# EAGLE board pe02 (EAGLE 9.6.2)
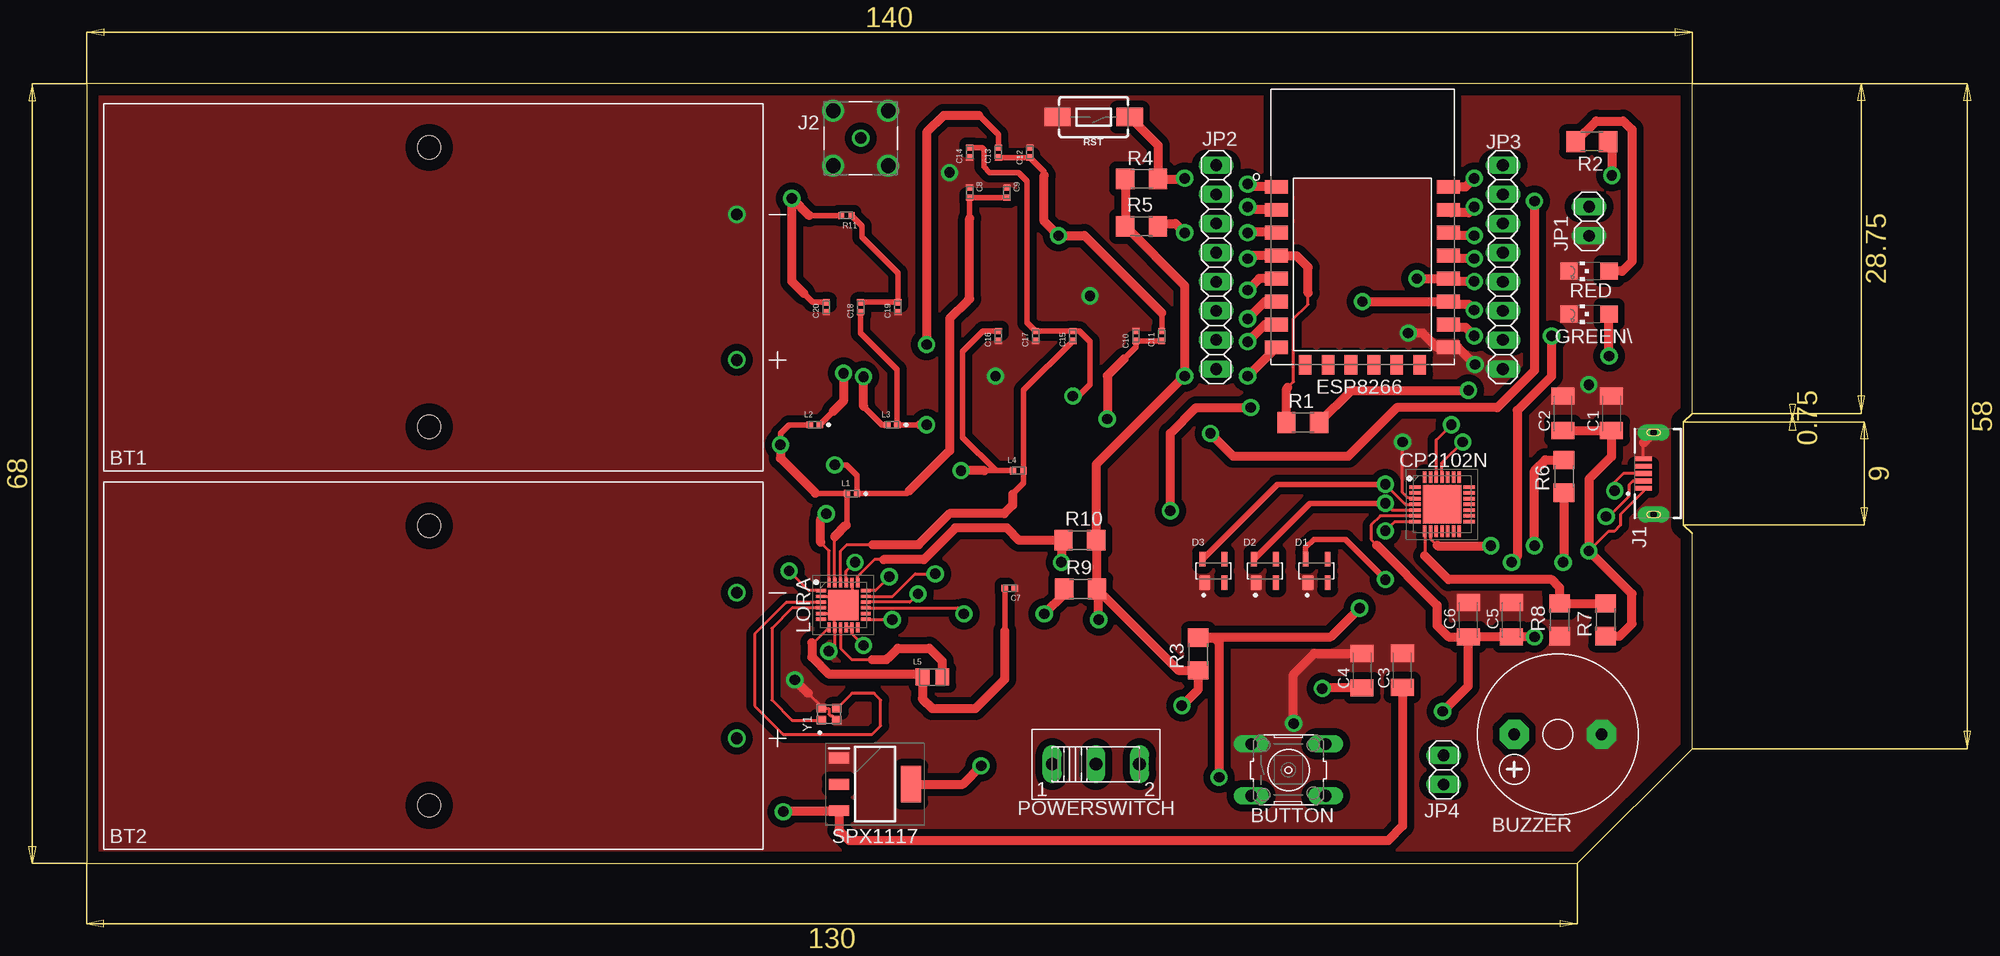
[diagram p0: board, top side]
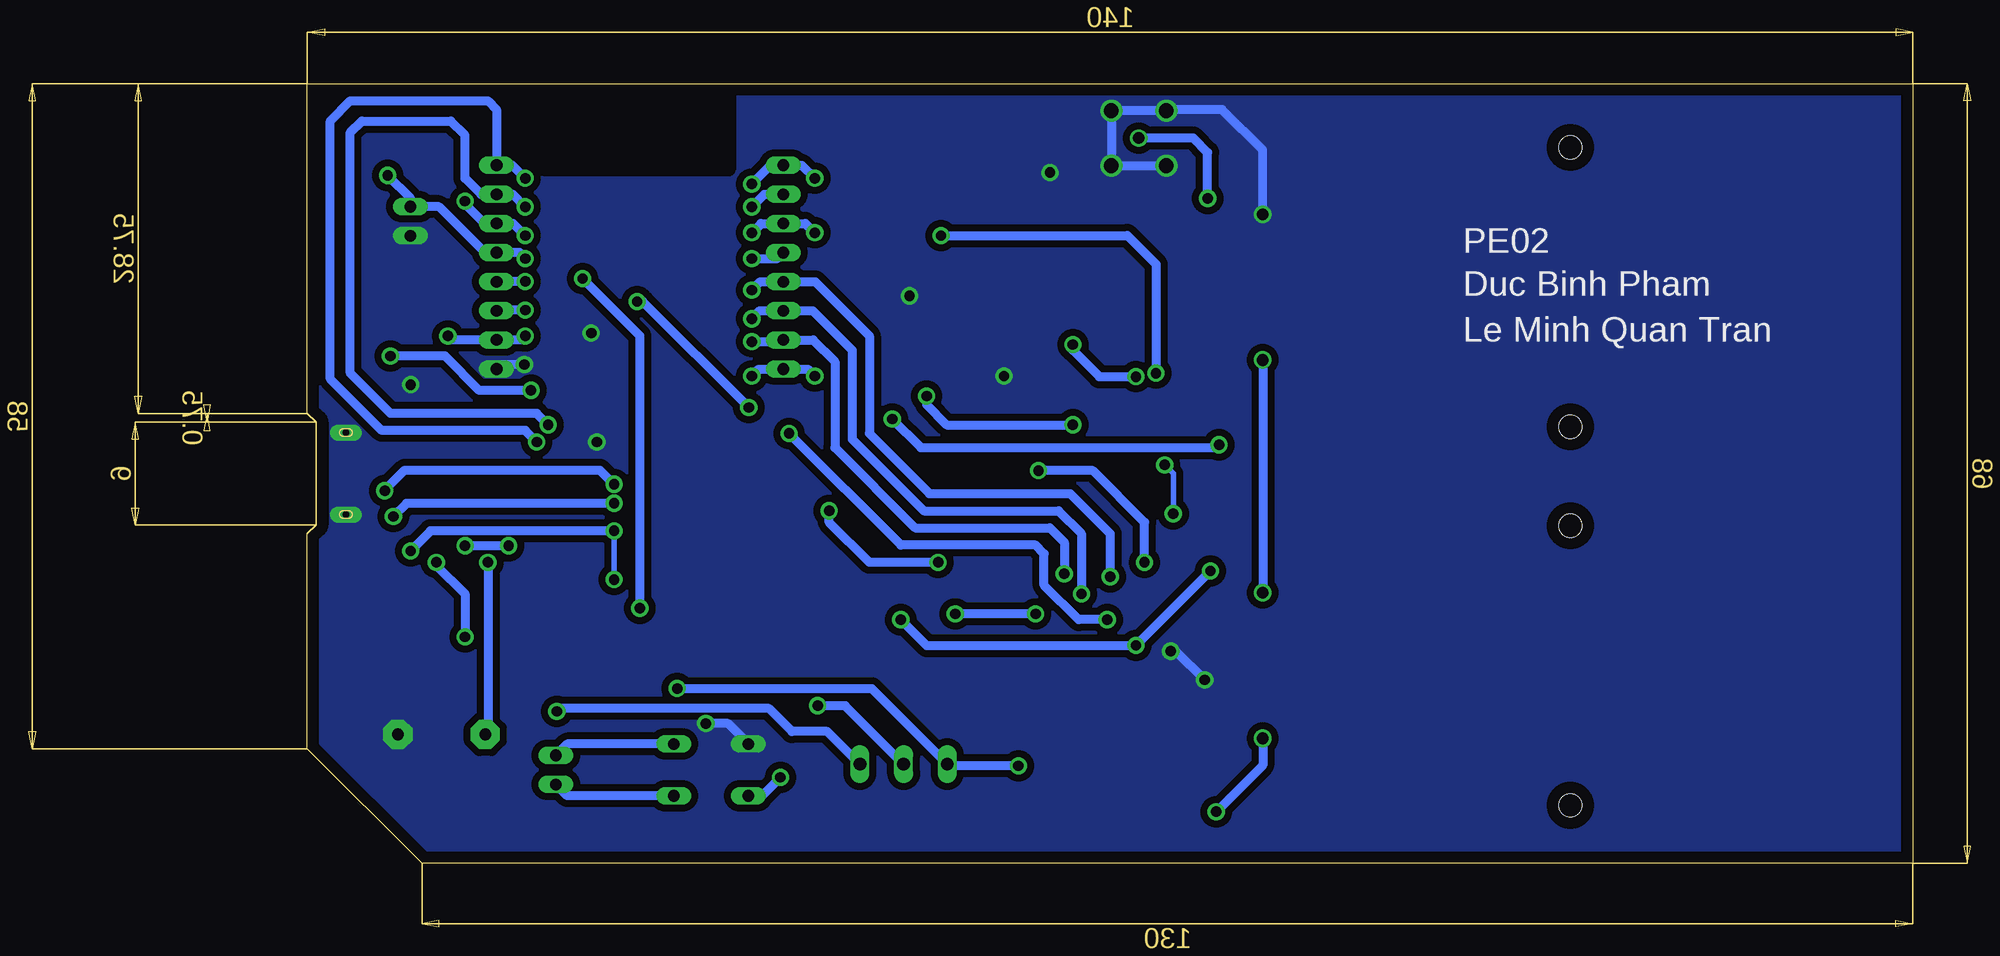
[diagram p1: board, bottom side, seen from below]

Size 140 x 68 mm. Coordinates in mm from the lower left corner, seen from the top.
Outline: 0,0 130,0 140,10 140,28.75 139.25,29.5 139.25,38.5 140,39.25 140,68 0,68 0,0
Copper layers (1*16): Top 0.035mm / dielectric 1.5mm / Bottom 0.035mm
Design rules "default": minimum track width 6mil, minimum drill 0.35mm, track to track 6mil, track to pad 6mil, pad to pad 6mil, via to via 6mil, smd to smd 6mil, copper to edge 40mil, drill to drill 6mil, minimum pad ring 10mil, minimum via ring 8mil, stop-mask expansion 4mil, vias tented up to drill 0mil, thermal gap 10mil
Net classes: 0 default: width 0.8 mm; 2 0.25: width 0.006 mm

## Footprints (pad centres in the part's own frame; a part is rotated, then mirrored left to right if it is on the bottom)
BAT_BA2AAPC-UL94V-0 = drill 1.02: + -26.44,6.35; - -26.44,-6.35 | hole 2.03: 0.38,12.19; 0.38,-12.19
B3F-10XX = drill 1.016 long: 1 -3.251,2.261; 2 3.251,2.261; 3 -3.251,-2.261; 4 3.251,-2.261
F/CM12P = drill 1.016 pad 2.54 octagon: + 3.81,0; - -3.81,0
C1206K = smd 1.5 x 2: 1 -1.5,0; 2 1.5,0
CAPC1005X55N = smd 0.54 x 0.6: 1 -0.432,0; 2 0.432,0
QFN50P500X500X80-29N = smd 1 x 0.3: 1 -2.35,1.5; 2 -2.35,1; 3 -2.35,0.5; 4 -2.35,0; 5 -2.35,-0.5; 6 -2.35,-1; 7 -2.35,-1.5; 15 2.35,-1.5; 16 2.35,-1; 17 2.35,-0.5; 18 2.35,0; 19 2.35,0.5; 20 2.35,1; 21 2.35,1.5 | smd 0.3 x 1: 8 -1.5,-2.35; 9 -1,-2.35; 10 -0.5,-2.35; 11 0,-2.35; 12 0.5,-2.35; 13 1,-2.35; 14 1.5,-2.35; 22 1.5,2.35; 23 1,2.35; 24 0.5,2.35; 25 0,2.35; 26 -0.5,2.35; 27 -1,2.35; 28 -1.5,2.35 | smd 3.35 x 3.35: 29 0,0
SOT143 = smd 0.99 x 1.3: 1 -0.76,-1.025 | smd 0.59 x 1.3: 2 0.96,-1.025; 3 0.96,1.025; 4 -0.96,1.025
XCVR_ESP8266-12E/ESP-12E = smd 2 x 1.2: 1 -7.5,7; 2 -7.5,5; 3 -7.5,3; 4 -7.5,1; 5 -7.5,-1; 6 -7.5,-3; 7 -7.5,-5; 8 -7.5,-7; 15 7.5,-7; 16 7.5,-5; 17 7.5,-3; 18 7.5,-1; 19 7.5,1; 20 7.5,3; 21 7.5,5; 22 7.5,7 | smd 1.1 x 1.7: 9 -5,-8.5; 10 -3,-8.5; 11 -1,-8.5; 12 1,-8.5; 13 3,-8.5; 14 5,-8.5
CHIPLED_1206 = smd 1.5 x 1.5: A 0,-1.75; C 0,1.75
GCT_USB3140-30-0070-1-C_REVE1 = smd 0.4 x 1.5: 1 -1.3,1.25; 2 -0.65,1.25; 3 0,1.25; 4 0.65,1.25; 5 1.3,1.25 | drill 0.6 pad 1.4 long: S1 -3.575,0.36; S2 3.575,0.36
LPRS_SMA_CONNECTOR = drill 1: 1 0,0 | drill 1.28: G1 -2.4,2.4; G2 -2.4,-2.4; G3 2.4,-2.4; G4 2.4,2.4
1X02 = drill 1.016 long: 1 -1.27,0; 2 1.27,0
1X08 = drill 1.016 long: 1 -8.89,0; 2 -6.35,0; 3 -3.81,0; 4 -1.27,0; 5 1.27,0; 6 3.81,0; 7 6.35,0; 8 8.89,0
INDC1005X55N = smd 0.54 x 0.6: 1 -0.432,0; 2 0.432,0
INDC1005X60N = smd 0.51 x 0.63: 1 -0.46,0; 2 0.46,0
INDC2012X145N = smd 1.2 x 1.47: 1 -0.86,0; 2 0.86,0
QFN50P400X400X100-25N = smd 0.85 x 0.3: 1 -1.95,1.25; 2 -1.95,0.75; 3 -1.95,0.25; 4 -1.95,-0.25; 5 -1.95,-0.75; 6 -1.95,-1.25; 13 1.95,-1.25; 14 1.95,-0.75; 15 1.95,-0.25; 16 1.95,0.25; 17 1.95,0.75; 18 1.95,1.25 | smd 0.3 x 0.85: 7 -1.25,-1.95; 8 -0.75,-1.95; 9 -0.25,-1.95; 10 0.25,-1.95; 11 0.75,-1.95; 12 1.25,-1.95; 19 1.25,1.95; 20 0.75,1.95; 21 0.25,1.95; 22 -0.25,1.95; 23 -0.75,1.95; 24 -1.25,1.95 | smd 2.65 x 2.65: 25 0,0
255SB = drill 1.118 long: 1 -3.81,0; 2 0,0; 3 3.81,0
R1206 = smd 1.6 x 1.803: 1 -1.422,0; 2 1.422,0
RESC1005X40N = smd 0.51 x 0.6: 1 -0.445,0; 2 0.445,0
TACTILE_SWITCH_SMD_6.0X3.5MM = smd 2.3 x 1.6: 1 -3.15,0; 2 3.15,0
SOT230P700X180-4N = smd 1.75 x 0.95: 1 -3.15,2.3; 2 -3.15,0; 3 -3.15,-2.3 | smd 1.75 x 3.2: 4 3.15,0
OSC_NX2016SA-24MHZ-EXS00A-CS10820 = smd 0.75 x 0.85: 1 -0.525,0.675; 2 -0.525,-0.675; 3 0.525,-0.675; 4 0.525,0.675

## Placement (x,y rotation side)
BT1  BA2AAPC-UL94V-0  [BAT_BA2AAPC-UL94V-0]  30.25,50.25 180 top
BT2  BA2AAPC-UL94V-0  [BAT_BA2AAPC-UL94V-0]  30.25,17.25 180 top
BUTTON  [B3F-10XX]  104.8,8.15 0 top
BUZZER  F/CM12P  [F/CM12P]  128.3,11.25 180 top
C1  0.1 uF  [C1206K]  132.97,39.25 90 top
C2  4.7 uF  [C1206K]  128.72,39.25 90 top
C3  4.7 uF  [C1206K]  114.72,16.84 90 top
C4  10 uF  [C1206K]  111.22,16.81 90 top
C5  4.7 uF  [C1206K]  124.22,21.25 90 top
C6  0.1 uF  [C1206K]  120.47,21.25 90 top
C7  GRM155R71A474KE01D  [CAPC1005X55N]  80.5,24 180 top
C8  GRM155R71C473KA01D  [CAPC1005X55N]  77,58.5 270 top
C9  GCM1555C1H820JA16D  [CAPC1005X55N]  80.25,58.5 270 top
C10  GJM1555C1H120JB01D  [CAPC1005X55N]  91.5,46 270 top
C11  GJM1555C1H3R6CB01D  [CAPC1005X55N]  93.75,46 90 top
C12  GJM1555C1H120JB01D  [CAPC1005X55N]  82.25,62 270 top
C13  GCM1555C1H101JA16D  [CAPC1005X55N]  79.5,62 90 top
C14  GJM1555C1H8R2CB01D  [CAPC1005X55N]  77,62 90 top
C15  GJM1555C1H4R7CB01D  [CAPC1005X55N]  86,46 90 top
C16  GJM1555C1H3R9CB01D  [CAPC1005X55N]  79.5,46 90 top
C17  GJM1555C1H1R0BB01D  [CAPC1005X55N]  82.75,46 90 top
C18  GCM1555C1H101JA16D  [CAPC1005X55N]  67.5,48.5 90 top
C19  GJM1555C1H120JB01D  [CAPC1005X55N]  70.75,48.5 90 top
C20  GJM1555C1H120JB01D  [CAPC1005X55N]  64.5,48.5 90 top
CP2102N  CP2102N-A02-GQFN28  [QFN50P500X500X80-29N]  118.19,31.31 0 top
D1  SP0503BAHTG  [SOT143]  107.25,25.5 0 top
D2  SP0503BAHTG  [SOT143]  102.75,25.5 0 top
D3  SP0503BAHTG  [SOT143]  98.25,25.5 0 top
ESP8266  ESP8266-12E/ESP-12E  [XCVR_ESP8266-12E/ESP-12E]  111.25,52 0 top
GREEN\  [CHIPLED_1206]  131,47.9 90 top
J1  USB3140-30-0070-1-C_REVE1  [GCT_USB3140-30-0070-1-C_REVE1]  137,34 90 top
J2  SMA_CONNECTOR  [LPRS_SMA_CONNECTOR]  67.5,63.25 0 top
JP1  [1X02]  131,56 90 top
JP2  [1X08]  98.5,52 270 top
JP3  [1X08]  123.5,52 270 top
JP4  [1X02]  118.34,8.15 90 top
L1  LQG15HS56NJ02D  [INDC1005X55N]  66.75,32.25 0 top
L2  LQG15HS8N2J02D  [INDC1005X55N]  63.5,38.25 0 top
L3  LQG15HN18NJ02D  [INDC1005X55N]  70.25,38.25 0 top
L4  LQW15AN33NH00D  [INDC1005X60N]  81.25,34.25 0 top
L5  MLZ2012M150WT000  [INDC2012X145N]  73.75,16.25 0 top
LORA  SX1268  [QFN50P400X400X100-25N]  65.99,22.53 0 top
POWERSWITCH  [255SB]  88.01,8.65 0 top
R1  100  [R1206]  106.05,38.45 0 top
R2  100  [R1206]  131.25,62.95 180 top
R3  10k  [R1206]  96.94,18.25 90 top
R4  10k  [R1206]  92,59.69 180 top
R5  10k  [R1206]  92,55.56 0 top
R6  1k  [R1206]  128.82,33.76 90 top
R7  22.1 k  [R1206]  132.44,21.25 270 top
R8  47.5 k  [R1206]  128.44,21.25 90 top
R9  10k  [R1206]  86.68,23.93 0 top
R10  10k  [R1206]  86.6,28.18 0 top
R11  CRCW04020000Z0ED  [RESC1005X40N]  66.25,56.5 180 top
RED  [CHIPLED_1206]  131,51.65 90 top
RST  MOMENTARY-SWITCH-SPST-SMD-6.0X3.5MM  [TACTILE_SWITCH_SMD_6.0X3.5MM]  87.81,65.09 180 top
SPX1117  SPX1117M3-L-3-3_TR  [SOT230P700X180-4N]  68.75,6.9 0 top
Y1  NX2016SA-24MHZ-EXS00A-CS10820  [OSC_NX2016SA-24MHZ-EXS00A-CS10820]  64.75,13 90 top

## Library data of the parts
BT1 BT2 = BA2AAPC-UL94V-0; AVAILABILITY: In Stock; CHECK_PRICES: https://www.snapeda.com/parts/BA2AAPC-UL94V-0/MPD/view-part/?ref=eda; DESCRIPTION: BATTERY HOLDER AA 2 CELL SMD TAB; MF: MPD; MP: BA2AAPC-UL94V-0; PACKAGE: None; PRICE: None; SNAPEDA_LINK: https://www.snapeda.com/parts/BA2AAPC-UL94V-0/MPD/view-part/?ref=snap
BUTTON = switch-omron; MPN: B3F-1000; OC_FARNELL: 176432; OC_NEWARK: 36M3542
BUZZER = buzzer; OC_FARNELL: unknown; OC_NEWARK: unknown
C1-C6 = rcl; SPICEPREFIX: C
C7 = GRM155R71A474KE01D; AVAILABILITY: In Stock; CHECK_PRICES: https://www.snapeda.com/parts/GRM155R71A474KE01D/Murata+Electronics+North+America/view-part/?ref=eda; DESCRIPTION: SMD capacitor X7R(EIA) with capacitance 0.47uF Tol.10%. Rated voltage 10Vdc 125C; MF: Murata; MP: GRM155R71A474KE01D; PACKAGE: 1005-2 Murata; PRICE: None; SNAPEDA_LINK: https://www.snapeda.com/parts/GRM155R71A474KE01D/Murata+Electronics+North+America/view-part/?ref=snap
C8 = GRM155R71C473KA01D; AVAILABILITY: In Stock; CHECK_PRICES: https://www.snapeda.com/parts/GRM155R71C473KA01D/Murata+Electronics+North+America/view-part/?ref=eda; DESCRIPTION: SMD capacitor X7R(EIA) with capacitance 47000pF Tol.10%. Rated voltage 16Vdc 125C; MF: Murata; MP: GRM155R71C473KA01D; PACKAGE: 1005-2 Murata; PRICE: None; SNAPEDA_LINK: https://www.snapeda.com/parts/GRM155R71C473KA01D/Murata+Electronics+North+America/view-part/?ref=snap
C9 = GCM1555C1H820JA16D; AVAILABILITY: In Stock; CHECK_PRICES: https://www.snapeda.com/parts/GCM1555C1H820JA16D/Murata+Electronics+North+America/view-part/?ref=eda; DESCRIPTION: Cap Ceramic 82pF 50V C0G 5% Pad SMD 0402 125C Automotive T/R; MF: Murata Electronics; MP: GCM1555C1H820JA16D; PACKAGE: 1005 Taiyo Yuden; PRICE: None; SNAPEDA_LINK: https://www.snapeda.com/parts/GCM1555C1H820JA16D/Murata+Electronics+North+America/view-part/?ref=snap
C10 C12 C19 C20 = GJM1555C1H120JB01D; AVAILABILITY: In Stock; CHECK_PRICES: https://www.snapeda.com/parts/GJM1555C1H120JB01D/Murata+Electronics+North+America/view-part/?ref=eda; DESCRIPTION: 12 pF ±5% 50V Ceramic Capacitor C0G, NP0 0402 (1005 Metric); MF: Murata; MP: GJM1555C1H120JB01D; PACKAGE: 1005 Taiyo Yuden; PRICE: None; SNAPEDA_LINK: https://www.snapeda.com/parts/GJM1555C1H120JB01D/Murata+Electronics+North+America/view-part/?ref=snap
C11 = GJM1555C1H3R6CB01D; AVAILABILITY: In Stock; CHECK_PRICES: https://www.snapeda.com/parts/GJM1555C1H3R6CB01D/Murata+Electronics+North+America/view-part/?ref=eda; DESCRIPTION: 0402 3.6 pF 50 V ±0.25 pF Tolerance C0G/NP0 Multilayer Ceramic Capacitor; MF: Murata; MP: GJM1555C1H3R6CB01D; PACKAGE: 1005 Taiyo Yuden; PRICE: None; SNAPEDA_LINK: https://www.snapeda.com/parts/GJM1555C1H3R6CB01D/Murata+Electronics+North+America/view-part/?ref=snap
C13 C18 = GCM1555C1H101JA16D; AVAILABILITY: In Stock; CHECK_PRICES: https://www.snapeda.com/parts/GCM1555C1H101JA16D/Murata+Electronics+North+America/view-part/?ref=eda; DESCRIPTION: SMD Multilayer Ceramic Capacitor, GCM Series, 100 pF, 5%, C0G / NP0, 50 V, 0402 [1005 Metric]; MF: Murata Electronics; MP: GCM1555C1H101JA16D; PACKAGE: 1005 Taiyo Yuden; PRICE: None; SNAPEDA_LINK: https://www.snapeda.com/parts/GCM1555C1H101JA16D/Murata+Electronics+North+America/view-part/?ref=snap
C14 = GJM1555C1H8R2CB01D; AVAILABILITY: In Stock; CHECK_PRICES: https://www.snapeda.com/parts/GJM1555C1H8R2CB01D/Murata+Electronics+North+America/view-part/?ref=eda; DESCRIPTION: 8.2 pF ±0.25pF 50V Ceramic Capacitor C0G, NP0 0402 (1005 Metric); MF: Murata; MP: GJM1555C1H8R2CB01D; PACKAGE: 1005 Taiyo Yuden; PRICE: None; SNAPEDA_LINK: https://www.snapeda.com/parts/GJM1555C1H8R2CB01D/Murata+Electronics+North+America/view-part/?ref=snap
C15 = GJM1555C1H4R7CB01D; AVAILABILITY: In Stock; CHECK_PRICES: https://www.snapeda.com/parts/GJM1555C1H4R7CB01D/Murata+Electronics+North+America/view-part/?ref=eda; DESCRIPTION: 0402 4.7pF 50V ±0.25 pF Tolerance C0G SMT Multilayer Ceramic Capacitor; MF: Murata; MP: GJM1555C1H4R7CB01D; PACKAGE: 1005 Taiyo Yuden; PRICE: None; SNAPEDA_LINK: https://www.snapeda.com/parts/GJM1555C1H4R7CB01D/Murata+Electronics+North+America/view-part/?ref=snap
C16 = GJM1555C1H3R9CB01D; AVAILABILITY: In Stock; CHECK_PRICES: https://www.snapeda.com/parts/GJM1555C1H3R9CB01D/Murata+Electronics+North+America/view-part/?ref=eda; DESCRIPTION: 0402 3.9 pF 50V ±0.25 pF Tolerance C0G SMT Multilayer Ceramic Capacitor; MF: Murata; MP: GJM1555C1H3R9CB01D; PACKAGE: 1005 Taiyo Yuden; PRICE: None; SNAPEDA_LINK: https://www.snapeda.com/parts/GJM1555C1H3R9CB01D/Murata+Electronics+North+America/view-part/?ref=snap
C17 = GJM1555C1H1R0BB01D; AVAILABILITY: In Stock; CHECK_PRICES: https://www.snapeda.com/parts/GJM1555C1H1R0BB01D/Murata+Electronics+North+America/view-part/?ref=eda; DESCRIPTION: 0402 1 pF 50 V ±0.1 pF Tolerance C0G SMT Multilayer Ceramic Capacitor; MF: Murata; MP: GJM1555C1H1R0BB01D; PACKAGE: 1005 Taiyo Yuden; PRICE: None; SNAPEDA_LINK: https://www.snapeda.com/parts/GJM1555C1H1R0BB01D/Murata+Electronics+North+America/view-part/?ref=snap
CP2102N = CP2102N-A02-GQFN28; DESCRIPTION: SILICON LABS - CP2102N-A02-GQFN28 - USB TO UART BRIDGE, -40 TO 85DEG C; HEIGHT: 0.8mm; MANUFACTURER_NAME: Silicon Labs; MANUFACTURER_PART_NUMBER: CP2102N-A02-GQFN28; MOUSER_PART_NUMBER: 634-CP2102NA02GQFN28; MOUSER_PRICE-STOCK: https://www.mouser.co.uk/ProductDetail/Silicon-Labs/CP2102N-A02-GQFN28?qs=u16ybLDytRaSBkSkyjYFiA%3D%3D
D1-D3 = SP0503BAHTG; AVAILABILITY: In Stock; CHECK_PRICES: https://www.snapeda.com/parts/SP0503BAHTG/Littelfuse+Inc./view-part/?ref=eda; DESCRIPTION: 8.5V Clamp - Ipp Tvs Diode Surface Mount SOT-143-4; MF: Littelfuse Inc.; MP: SP0503BAHTG; PACKAGE: SOT-143 Littelfuse; PRICE: None; SNAPEDA_LINK: https://www.snapeda.com/parts/SP0503BAHTG/Littelfuse+Inc./view-part/?ref=snap
ESP8266 = ESP8266-12E_ESP-12E; AVAILABILITY: Not in stock; CHECK_PRICES: https://www.snapeda.com/parts/ESP8266-12E/ESP-12E/AI-Thinker/view-part/?ref=eda; DESCRIPTION: This WiFi module has a 32-bit MCU micro and clock speeds supporting 80 MHz or 160 MHz. Supports the RTOS and integrated Wi-Fi MAC/BB/RF/PA/LNA, and has an on-board antenna.; MF: AI-Thinker; MP: ESP8266-12E/ESP-12E; PACKAGE: None; PRICE: None; SNAPEDA_LINK: https://www.snapeda.com/parts/ESP8266-12E/ESP-12E/AI-Thinker/view-part/?ref=snap
GREEN\ RED = led
J1 = USB3140-30-0070-1-C_REVE1; AVAILABILITY: In Stock; CHECK_PRICES: https://www.snapeda.com/parts/USB3140-30-0070-1-C/Global+Connector+Technology/view-part/?ref=eda; DESCRIPTION: USB - micro B USB 2.0 Receptacle Connector 5 Position Surface Mount, Through Hole; MF: Global Connector Technology; MP: USB3140-30-0070-1-C; PACKAGE: None; PRICE: None; SNAPEDA_LINK: https://www.snapeda.com/parts/USB3140-30-0070-1-C/Global+Connector+Technology/view-part/?ref=snap
J2 = SMA_CONNECTOR; AVAILABILITY: In Stock; CHECK_PRICES: https://www.snapeda.com/parts/SMA%20CONNECTOR/LPRS/view-part/?ref=eda; DESCRIPTION: RF Coaxial Straight SMA Connector; MF: LPRS; MP: SMA CONNECTOR; PACKAGE: None; PRICE: None; PURCHASE-URL: https://www.snapeda.com/api/url_track_click_mouser/?unipart_id=4703486&manufacturer=LPRS&part_name=SMA CONNECTOR&search_term=None; SNAPEDA_LINK: https://www.snapeda.com/parts/SMA%20CONNECTOR/LPRS/view-part/?ref=snap
JP1-JP4 = pinhead
L1 = LQG15HS56NJ02D; AVAILABILITY: In Stock; CHECK_PRICES: https://www.snapeda.com/parts/LQG15HS56NJ02D/Murata+Electronics+North+America/view-part/?ref=eda; DESCRIPTION: Inductor with Inductance: 56nH Tol. +/-5%, Package: 0402 (1005); MF: Murata; MP: LQG15HS56NJ02D; PACKAGE: 1005 Murata; PRICE: None; SNAPEDA_LINK: https://www.snapeda.com/parts/LQG15HS56NJ02D/Murata+Electronics+North+America/view-part/?ref=snap
L2 = LQG15HS8N2J02D; AVAILABILITY: In Stock; CHECK_PRICES: https://www.snapeda.com/parts/LQG15HS8N2J02D/Murata+Electronics+North+America/view-part/?ref=eda; DESCRIPTION: Inductor with Inductance: 8.2nH Tol. +/-5%, Package: 0402 (1005); MF: Murata; MP: LQG15HS8N2J02D; PACKAGE: 1005 Murata; PRICE: None; SNAPEDA_LINK: https://www.snapeda.com/parts/LQG15HS8N2J02D/Murata+Electronics+North+America/view-part/?ref=snap
L3 = LQG15HN18NJ02D; AVAILABILITY: In Stock; CHECK_PRICES: https://www.snapeda.com/parts/LQG15HN18NJ02D/Murata+Electronics+North+America/view-part/?ref=eda; DESCRIPTION: Inductor with Inductance: 18nH Tol. +/-5%, Package: 0402 (1005); MF: Murata; MP: LQG15HN18NJ02D; PACKAGE: 1005 Murata; PRICE: None; SNAPEDA_LINK: https://www.snapeda.com/parts/LQG15HN18NJ02D/Murata+Electronics+North+America/view-part/?ref=snap
L4 = LQW15AN33NH00D; AVAILABILITY: In Stock; CHECK_PRICES: https://www.snapeda.com/parts/LQW15AN33NH00D/Murata+Electronics+North+America/view-part/?ref=eda; DESCRIPTION: Inductor with Inductance: 33nH Tol. +/-3%, Package: 0402 (1005); MF: Murata; MP: LQW15AN33NH00D; PACKAGE: 1005 Murata; PRICE: None; SNAPEDA_LINK: https://www.snapeda.com/parts/LQW15AN33NH00D/Murata+Electronics+North+America/view-part/?ref=snap
L5 = MLZ2012M150WT000; AVAILABILITY: In Stock; CHECK_PRICES: https://www.snapeda.com/parts/MLZ2012M150WT000/TDK/view-part/?ref=eda; DESCRIPTION: Inductor Power Shielded Multi-Layer 15uH 20% 2MHz Ferrite 0.25A 1.235Ohm DCR 0805 T/R; MF: TDK Corporation; MP: MLZ2012M150WT000; PACKAGE: None; PRICE: None; SNAPEDA_LINK: https://www.snapeda.com/parts/MLZ2012M150WT000/TDK/view-part/?ref=snap
LORA = SX1268; DESCRIPTION: LoRa Connect Long Range Low Power LoRa Transceiver +22dBm, China frequency bands; HEIGHT: 1mm; MANUFACTURER_NAME: SEMTECH; MANUFACTURER_PART_NUMBER: SX1268
POWERSWITCH = switch
R1-R10 = rcl; SPICEPREFIX: R
R11 = CRCW04020000Z0ED; AVAILABILITY: In Stock; CHECK_PRICES: https://www.snapeda.com/parts/CRCW04020000Z0ED/Vishay+Dale/view-part/?ref=eda; DESCRIPTION: 0 Ohms Jumper 0.2W, 1/5W Chip Resistor 0402 (1005 Metric) Automotive AEC-Q200, Pulse Withstanding Thick Film; MF: Vishay; MP: CRCW04020000Z0ED; PACKAGE: 1005 Panasonic Electronic Components; PRICE: None; SNAPEDA_LINK: https://www.snapeda.com/parts/CRCW04020000Z0ED/Vishay+Dale/view-part/?ref=snap
RST = SparkFun-Switches; PROD_ID: SWCH-14278; SF_SKU: COM-08229
SPX1117 = SPX1117M3-L-3-3_TR; ARROW_PART_NUMBER: SPX1117M3-L-3-3/TR; ARROW_PRICE-STOCK: https://www.arrow.com/en/products/spx1117m3-l-3-3tr/exar; DESCRIPTION: LDO Regulator 3.3V 800mA 2.6-15V TO263-3; HEIGHT: 1.8mm; MANUFACTURER_NAME: EXAR; MANUFACTURER_PART_NUMBER: SPX1117M3-L-3-3/TR; MOUSER_PART_NUMBER: 701-SPX1117M3-L-33TR; MOUSER_PRICE-STOCK: https://www.mouser.com/Search/Refine.aspx?Keyword=701-SPX1117M3-L-33TR
Y1 = NX2016SA-24MHZ-EXS00A-CS10820; AVAILABILITY: In Stock; CHECK_PRICES: https://www.snapeda.com/parts/NX2016SA-24MHZ-EXS00A-CS10820/NDK+America%252C+Inc./view-part/?ref=eda; DESCRIPTION: 24 MHz ±15ppm Crystal 8pF 80 Ohms 4-SMD, No Lead; MF: NDK America, Inc.; MP: NX2016SA-24MHZ-EXS00A-CS10820; PACKAGE: SMD-4 NDK America,; PRICE: None; SNAPEDA_LINK: https://www.snapeda.com/parts/NX2016SA-24MHZ-EXS00A-CS10820/NDK+America%252C+Inc./view-part/?ref=snap

## Nets
3.3V [random]: ESP8266.8 JP2.8 LORA.1 LORA.10 LORA.11 POWERSWITCH.2 R3.1 R4.2 R5.1 R9.2 R10.2
3.3V_LDO [random]: C4.1 POWERSWITCH.1 SPX1117.4
3.3V_USB [random]: C5.1 C6.1 CP2102N.6 POWERSWITCH.3 R6.1
6V [random]: BT2.+ C3.1 SPX1117.3
BGND [random]: CP2102N.29
ESP_ADC [random]: ESP8266.2 JP2.2
ESP_CS0 [random]: ESP8266.9
ESP_EN [random]: ESP8266.3 JP2.3 R5.2
ESP_MISO [random]: ESP8266.10
ESP_MOSI [random]: ESP8266.13
ESP_RST [random]: ESP8266.1 JP2.1 R4.1 RST.1
ESP_RXD [random]: CP2102N.26 ESP8266.21 JP3.2
ESP_SCLK [random]: ESP8266.14
ESP_TXD [random]: CP2102N.25 ESP8266.22 JP3.1
GND [random]: BT1.- BUTTON.1 BUZZER.- C1.2 C2.2 C3.2 C4.2 C5.2 C6.2 C7.1 C8.1 C9.1 C10.1 C12.1 C14.1 C16.1 C17.1 C19.1 C20.1 CP2102N.3 D1.1 D2.1 D3.1 ESP8266.15 GREEN\.C J1.5 J1.S1 J1.S2 J2.G1 J2.G2 J2.G3 J2.G4 JP1.1 JP3.8 LORA.2 LORA.5 LORA.8 LORA.20 LORA.25 R8.1 RED.C RST.2 SPX1117.1 Y1.2 Y1.4
GPIO0 [random]: BUTTON.3 ESP8266.18 JP3.5 R3.2
GPIO2 [random]: ESP8266.17 JP3.6 LORA.19 R10.1
GPIO4 [random]: ESP8266.19 JP1.2 JP3.4 R2.1
GPIO5 [random]: ESP8266.20 JP3.3 LORA.13
GPIO9 [random]: ESP8266.11
GPIO10 [random]: ESP8266.12
GPIO12 [random]: ESP8266.6 JP2.6 LORA.16
GPIO13 [random]: ESP8266.7 JP2.7 LORA.17
GPIO14 [random]: ESP8266.5 JP2.5 LORA.18
GPIO15 [random]: BUZZER.+ ESP8266.16 JP3.7
GPIO16 [random]: ESP8266.4 JP2.4 R1.1
LORA_BUSY [random]: LORA.14
LORA_DIO2 [random]: LORA.12
LORA_DIO3 [random]: LORA.6
LORA_RFI_N [random]: C15.1 L4.2 LORA.22
LORA_RFI_P [random]: C16.2 L4.1 LORA.21
LORA_RFO [random]: C10.2 C11.1 L1.1 L2.1 LORA.23
LORA_RST [random]: LORA.15 R9.1
LORA_VR_PA [random]: C8.2 C9.2 L1.2 LORA.24
LORA_XTA [random]: LORA.3 Y1.3
LORA_XTB [random]: LORA.4 Y1.1
N$1 [random]: BUTTON.4 JP4.1
N$2 [random]: BUTTON.2 JP4.2
N$3 [random]: C7.2 L5.1 LORA.7
N$4 [random]: L5.2 LORA.9
N$5 [random]: CP2102N.5 D2.4 J1.2
N$6 [random]: C13.2 L3.1
N$7 [random]: GREEN\.A R1.2
N$8 [random]: R2.2 RED.A
N$9 [random]: C11.2 C12.2 C13.1 L2.2
N$10 [random]: BT1.+ BT2.-
N$12 [random]: C14.2 C15.2 C17.2 C18.1 L3.2
N$13 [random]: C20.2 J2.1 R11.2
N$15 [random]: C18.2 C19.2 R11.1
N$34 [random]: CP2102N.4 D3.4 J1.3
N$39 [random]: CP2102N.9 R6.2
N$40 [random]: CP2102N.8 R7.1 R8.2
N$42 [random]: C1.1 C2.1 CP2102N.7 D1.4 J1.1 R7.2

## Tracks (layer width: path | path; a pad name or v marks a point on that pad's centre or on a via)
3.3V  (via drill 0.9 pad 1.5)
  Top 0.25: LORA.10 LORA.11 66.74,20.01 v67.75,19 | LORA.1 62.97,23.78 v61.25,25.5
  Top 0.8: v95.5,13.75 96.94,15.19 R3.1 95.2,16.83 R9.2 | R4.2 R5.1 95.75,50.39 v95.75,42.5 88.02,34.77 R10.2 88.1,28.1 R9.2 | v88.25,21.25 88.25,23.78 R9.2 | ESP8266.8 v101.25,42.5
  Bottom 0.8: POWERSWITCH.2 93.11,13.75 v95.5,13.75 | v88.25,21.25 86,19 v67.75,19 v61.25,25.5 | v101.25,42.5 100.64,43.11 JP2.8 96.36,43.11 v95.75,42.5
3.3V_LDO  (via drill 0.9 pad 1.5)
  Top 0.8: SPX1117.4 76.4,6.9 v78,8.5 | C4.1 107.81,15.31 v107.75,15.25
  Bottom 0.8: v78,8.5 84.05,8.5 POWERSWITCH.1 90.8,15.25 v107.75,15.25
3.3V_USB  (via drill 0.9 pad 1.5)
  Top 0.25: CP2102N.6 112.81,30.31 112,29.5 112,28.25 112.5,27.75
  Top 0.8: C6.1 C5.1 v126.25,19.75 | v118.25,13.25 120.47,15.47 C6.1 | R6.1 128.82,26.32 v128.75,26.25 | 112.5,27.75 117.75,22.5 117.75,20.75 118.75,19.75 C6.1
  Bottom 0.8: POWERSWITCH.3 94.67,11.5 97.75,11.5 99.75,13.5 118,13.5 v118.25,13.25 | v128.75,26.25 128.75,26 126.25,23.5 v126.25,19.75
6V  (via drill 0.9 pad 1.5)
  Top 0.8: v60.75,4.5 60.85,4.6 SPX1117.3 65.6,2.9 66.5,2 113.5,2 114.75,3.25 114.72,3.28 C3.1
  Bottom 0.8: BT2.+ 56.69,8.56 v60.75,4.5
ESP_ADC  (via drill 0.9 pad 1.5)
  Top 0.8: ESP8266.2 101.5,57 v101.25,57.25
  Bottom 0.8: v101.25,57.25 100.15,58.35 JP2.2
ESP_EN  (via drill 0.9 pad 1.5)
  Top 0.8: ESP8266.3 103.69,55.06 101.31,55.06 v101.25,55 | R5.2 93.67,55.81 94.94,55.81 v95.75,55
  Bottom 0.8: v101.25,55 100.44,55.81 JP2.3 96.56,55.81 v95.75,55
ESP_RST  (via drill 0.9 pad 1.5)
  Top 0.8: ESP8266.1 101.5,59 v101.25,59.25 | v95.75,59.75 95.69,59.69 R4.1 93.42,62.63 RST.1
  Bottom 0.8: v101.25,59.25 99.61,60.89 JP2.1 96.89,60.89 v95.75,59.75
ESP_RXD  (via drill 0.9 pad 1.5)
  Top 0.25: CP2102N.26 117.69,36.94 v119,38.25
  Top 0.8: ESP8266.21 119,56.75 120.5,56.75 v121,57.25
  Bottom 0.8: v119,38.25 120,39.25 132.75,39.25 136.25,42.75 136.25,63.75 135.25,64.75 127.5,64.75 126.25,63.5 126.25,59.75 124.85,58.35 JP3.2 122.1,58.35 v121,57.25
ESP_TXD  (via drill 0.9 pad 1.5)
  Top 0.25: CP2102N.25 118.19,34.94 v120,36.75
  Top 0.8: ESP8266.22 120.25,59 v121,59.75
  Bottom 0.8: v120,36.75 121,37.75 133.5,37.75 138,42.25 138,64.75 136.25,66.5 124.25,66.5 123.5,65.75 JP3.1 122.14,60.89 v121,59.75
GND  (via drill 0.9 pad 1.5)
  Top 0.25: 65,21.78 65.24,21.78 LORA.8 65.24,19.02 v64.72,18.5 | LORA.2 64.72,23.28 65,23 65,21.78 | LORA.5 65,21.78 | J1.5 135.75,36.69 | CP2102N.3 115.77,31.88 115.22,31.88 114.75,32.36 v114.75,36.75 | LORA.20 66.74,23.28 LORA.25 | 62.92,14.83 64.08,13.68 Y1.4 64.1,13.5 64.72,13.5 64.72,13.04 64.89,12.87 65.03,12.87 Y1.2
  Top 0.8: v105.25,12.2 105.25,16.5 107.06,18.31 C4.2 | v61.75,16 62.92,14.83 | v115.25,46.25 116.5,46.25 117.75,45 ESP8266.15 119.57,45 v121.07,43.5 | 135.75,36.69 J1.S2
  Bottom 0.8: BUTTON.1 103.34,12.2 v105.25,12.2 | BT1.- 56.69,62.19 60.25,65.75 65,65.75 J2.G1 J2.G4 J2.G3 J2.G2 | v61.75,16 64.25,18.5 v64.72,18.5 | v121.07,43.5 123.11,43.5 JP3.8
  other vias: 131,41.75 79.25,42.5 87.5,49.5 75.25,60.25
  pour Top (isolate 0.61, no thermals): 0.5,67.5 102.5,67.5 102.5,60.5 120,60.5 120,67.5 139.5,67.5 139.5,9.5 130.5,0.5 0.5,0.5
  pour Bottom (isolate 0.61, no thermals): 0,68 102.5,68 102.5,60.5 120,60.5 120,68 140,68 140,10 130,0 0,0
GPIO0  (via drill 0.9 pad 1.5)
  Top 0.8: v98.75,7.5 98.75,19.25 98.33,19.67 R3.2 97.02,19.75 108.5,19.75 v111,22.25 | v116,51 ESP8266.18 119,50.75 v121,50.75
  Bottom 0.8: v98.75,7.5 100.36,5.89 BUTTON.3 | v111,22.25 111,46 v116,51 | v121,50.75 123.48,50.75 JP3.5
GPIO2  (via drill 0.9 pad 1.5)
  Top 0.25: LORA.19 67.24,25.04 68.7,26.5 69.5,26.5
  Top 0.8: 69.5,26.5 73,26.5 75.75,29.25 80.25,29.25 81.32,28.18 R10.1 85,28 v85,26.25 | v121,48.25 120.5,48.75 119,48.75 ESP8266.17 v111.25,49 | v94.5,30.75 94.5,37.5 96.75,39.75 v101.5,39.75
  Bottom 0.8: v85,26.25 91,26.25 94.5,29.75 v94.5,30.75 | v101.5,39.75 110.75,49 v111.25,49 | v121,48.25 123.44,48.25 JP3.6
GPIO4  (via drill 0.9 pad 1.5)
  Top 0.8: R2.1 133,62.62 v133,60 | ESP8266.19 119,52.75 v121,52.75
  Bottom 0.8: v133,60 131,58 JP1.2 128.52,57.27 124.52,53.27 JP3.4 121.52,53.27 v121,52.75
GPIO5  (via drill 0.9 pad 1.5)
  Top 0.25: LORA.13 70.22,21.28 v70.25,21.25
  Top 0.8: v121,54.75 119,54.75 ESP8266.20 | v98,37.5 100,35.5 110,35.5 114.25,39.75 123.01,39.75 126.25,42.99 v126.25,57.75
  Bottom 0.8: v70.25,21.25 72.75,21.25 75.75,24.25 75.75,27 76.5,27.75 88.25,27.75 v98,37.5 | v126.25,57.75 126.25,57.5 124.56,55.81 JP3.3 122.06,55.81 v121,54.75
GPIO12  (via drill 0.9 pad 1.5)
  Top 0.25: v72.5,23.5 71.78,22.78 LORA.16
  Top 0.8: ESP8266.6 102.75,49 v101.25,47.5
  Bottom 0.8: v72.5,23.5 72.5,28.75 74.5,30.75 86.25,30.75 92.5,37 92.5,44.75 95.94,48.19 JP2.6 100.56,48.19 v101.25,47.5
GPIO13  (via drill 0.9 pad 1.5)
  Top 0.25: LORA.17 70.28,23.28 72.25,25.25 v74,25.25
  Top 0.8: ESP8266.7 102.75,47 v101.25,45.5
  Bottom 0.8: v74,25.25 74,28 75.25,29.25 87,29.25 94,36.25 94,43.75 95.9,45.65 JP2.7 98.65,45.5 v101.25,45.5
GPIO14  (via drill 0.9 pad 1.5)
  Top 0.25: v70,25 68.78,23.78 LORA.18
  Top 0.8: ESP8266.5 102.25,51 v101.25,50
  Bottom 0.8: v70,25 70,28.75 73.5,32.25 85.75,32.25 91,37.5 91,46 95.73,50.73 JP2.5 100.52,50.73 v101.25,50
GPIO15  (via drill 0.9 pad 1.5)
  Top 0.8: ESP8266.16 119,46.75 120.25,46.75 v121,46 | v127.75,46 127.75,42.5 124.75,39.5 124.75,26.75 v124.25,26.25
  Bottom 0.8: BUZZER.+ 124.24,11.5 v124.24,26.24 v124.25,26.25 | v121,46 121.35,45.65 JP3.7 127.4,45.65 v127.75,46
GPIO16  (via drill 0.9 pad 1.5)
  Top 0.25: 104.75,41.5 105.25,42 105.25,47.5 106.5,48.75 106.5,49.75
  Top 0.8: v101.25,52.75 101.5,53 ESP8266.4 105.5,53 106.5,52 106.5,49.75 | R1.1 104.63,41.38 104.75,41.5
  Bottom 0.8: v101.25,52.75 99.02,52.75 JP2.4
LORA_RFI_N
  Top 0.25: 68.55,27.8 66.3,27.8 65.74,27.24 LORA.22
  Top 0.5: 80.75,32.21 81.71,33.17 L4.2 81.71,41.28 C15.1
  Top 0.8: 68.55,27.8 72.55,27.8 75.25,30.5 80,30.5 80.75,31.25 80.75,32.21
LORA_RFI_P  (via drill 0.9 pad 1.5)
  Top 0.25: LORA.21 66.24,25.49 v67,26.25
  Top 0.5: 78.29,34.25 L4.1 79.29,34.25 76.39,37.15 76.39,44.64 78.18,46.43 C16.2
  Top 0.8: 78.29,34.25 v76.25,34.25
  Bottom 0.8: v67,26.25 67,29.75 71.5,34.25 v76.25,34.25
LORA_RFO  (via drill 0.9 pad 1.5)
  Top 0.25: LORA.23 65.24,28.49 65.25,28.5
  Top 0.5: 63.55,32.3 63.59,32.25 L1.1 66.32,29.57 66.24,29.49 | L2.1 61.25,38.25 60.5,37.5 v60.5,36.5 | C11.1 C10.2 91.5,45.03 90.47,44
  Top 0.8: 65.25,28.5 66.24,29.49 | v60.5,36.5 60.5,35.34 63.55,32.3 | 90.47,44 89,42.53 v89,38.75
  Bottom 0.8: v89,38.75 86.5,36.25 60.75,36.25 v60.5,36.5
LORA_RST  (via drill 0.9 pad 1.5)
  Top 0.25: LORA.15 75.97,22.28 v76.5,21.75
  Top 0.8: v83.5,21.75 85.26,23.51 R9.1
  Bottom 0.8: v76.5,21.75 v83.5,21.75
LORA_VR_PA  (via drill 0.9 pad 1.5)
  Top 0.25: LORA.24 64.74,27.26 64,28
  Top 0.5: 71.75,32.5 71.5,32.25 L1.2 67.18,33.82 66.25,34.75 v65.25,34.75 | 77,56.25 C8.2 C9.2 | 76.84,49.09 77,49.25
  Top 0.8: 64,28 64,30 v64.5,30.5 | 76.84,49.09 75.25,47.5 75.25,36 71.75,32.5 | 77,49.25 77,56.25
  Bottom 0.5: v64.5,30.5 64.5,34 v65.25,34.75
LORA_XTA
  Top 0.25: LORA.3 64.01,22.75 61,22.75 58.25,20 58.25,13.75 60.75,11.25 68.5,11.25 69.25,12 69.25,14.25 68.67,14.83 66.73,14.83 Y1.3
LORA_XTB
  Top 0.25: LORA.4 61.53,22.28 59.75,20.5 59.75,14.25 61.52,12.47 Y1.1
N$1
  Bottom 0.8: BUTTON.4 117.35,5.89 JP4.1
N$2
  Bottom 0.8: BUTTON.2 117.35,10.41 JP4.2
N$3
  Top 0.25: LORA.7 63.42,19.26 63.24,19.26 63.25,19.25
  Top 0.5: 80.07,20.25 C7.2
  Top 0.8: 63.25,19.25 63.25,18 64.75,16.5 72.64,16.5 L5.1 72.89,14.36 73.75,13.5 77.5,13.5 80.07,16.07 80.07,20.25
N$4
  Top 0.25: LORA.9 65.75,18.75 66.75,17.75 68.5,17.75 | 69.88,17.88 69.75,17.75
  Top 0.8: 69.88,17.88 70.75,18.75 73.5,18.75 74.61,17.64 L5.2 | 69.75,17.75 68.5,17.75
N$5  (via drill 0.9 pad 1.5)
  Top 0.25: v113.25,31.4 113.84,30.81 CP2102N.5 | v132.5,30.25 132.75,30.25 134.5,32 134.5,33 134.85,33.35 J1.2
  Top 0.5: D2.4 106.67,31.4 v113.25,31.4
  Bottom 0.8: v113.25,31.4 131.35,31.4 v132.5,30.25
N$6  (via drill 0.9 pad 1.5)
  Top 0.5: L3.1 69.36,38.25 67.75,39.86 | C13.2 79.5,63.56 77.81,65.25
  Top 0.8: v73.25,45.25 73.25,63.75 74.75,65.25 77.81,65.25 | 67.75,39.86 v67.75,42.45
  Bottom 0.8: v73.25,45.25 73.25,44.75 70.95,42.45 v67.75,42.45
N$7  (via drill 0.9 pad 1.5)
  Top 0.8: R1.2 110.27,41.25 v120.5,41.25 | v132.75,44.25 GREEN\.A
  Bottom 0.8: v120.5,41.25 125,41.25 128,44.25 v132.75,44.25
N$8
  Top 0.8: R2.2 131.63,64.75 134,64.75 134.75,64 134.75,52.5 133.9,51.65 RED.A
N$9  (via drill 0.9 pad 1.5)
  Top 0.5: 65.09,39.41 L2.2 | C13.1 C12.2 83.5,60.32 83.5,60 | 93.75,48 C11.2
  Top 0.8: v66,42.75 66,40.32 65.09,39.41 | 83.5,60 83.5,56 v84.75,54.75 87,54.75 93.75,48
  Bottom 0.8: v84.75,54.75 68.5,54.75 66,52.25 v66,42.75
N$10
  Bottom 0.8: BT1.+ BT2.-
N$12  (via drill 0.9 pad 1.5)
  Top 0.5: 72.66,38.25 L3.2 70.68,43.07 67.5,46.25 C18.1 | C14.2 78.07,62.43 78.25,62.25 78.25,60.75 78.75,60.25 81.25,60.25 82,59.5 82,47.18 C17.2 C15.2 86.57,46.43 87.5,45.5 87.5,41.75 86.5,40.75 v86,40.75
  Top 0.8: 72.66,38.25 v73.25,38.25
  Bottom 0.8: v86,40.75 86,40 84.25,38.25 v73.25,38.25
N$13  (via drill 0.9 pad 1.5)
  Top 0.5: 63,56.5 R11.2 | 62.55,49.7 63.32,48.93 C20.2
  Top 0.8: 62.55,49.7 61.5,50.75 v61.5,58 63,56.5
  Bottom 0.8: v61.5,58 61.5,62 62.75,63.25 J2.1
N$15
  Top 0.5: R11.1 67.62,55.58 67.62,54.63 70.75,51.5 C19.2 C18.2
N$34  (via drill 0.9 pad 1.5)
  Top 0.25: v113.25,33.05 115,31.31 CP2102N.4 | J1.3 134,34 133.25,33.25 v133.25,32.5
  Top 0.5: D3.4 103.82,33.05 v113.25,33.05
  Bottom 0.8: v133.25,32.5 133.25,32.55 131.5,34.3 114.5,34.3 v113.25,33.05
N$39  (via drill 0.9 pad 1.5)
  Top 0.25: CP2102N.9 117.19,28.31 117.75,27.75
  Top 0.8: v126.25,27.7 126.25,34.25 127.18,35.18 R6.2 | 117.75,27.75 117.8,27.7 v122.45,27.7
  Bottom 0.8: v122.45,27.7 v126.25,27.7
N$40
  Top 0.25: CP2102N.8 116.69,26.81
  Top 0.8: R7.1 R8.2 128.44,24.06 127.75,24.75 118.75,24.75 116.69,26.81
N$42  (via drill 0.9 pad 1.5)
  Top 0.25: v113.25,29 114.06,29.81 CP2102N.7 | v131,27.25 132.7,28.95 133.2,28.95 133.75,29.5 133.75,30.43 134.9,31.58 134.9,31.6 135.75,32.45 J1.1
  Top 0.5: D1.4 106.29,27.54 107,28.25 109.75,28.25 v113.25,24.75
  Top 0.8: C2.1 C1.1 132.97,35.47 131,33.5 v131,27.25 134.75,23.5 134.75,20.89 133.69,19.83 R7.2
  Bottom 0.5: v113.25,24.75 v113.25,29
  Bottom 0.8: v113.25,29 129.25,29 v131,27.25

## Text on the board
bNames: PE02 | Duc Binh Pham | Le Minh Quan Tran